# EAGLE board bottom (EAGLE 9.1.1)
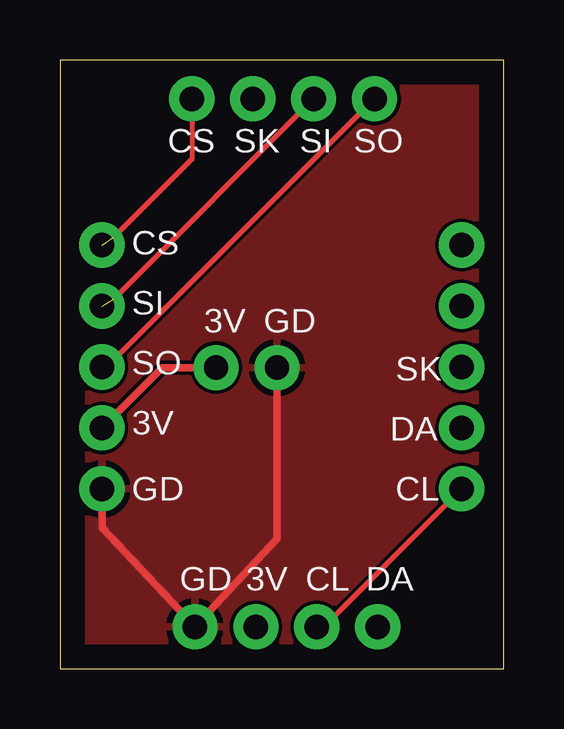
[diagram p0: board, top side]
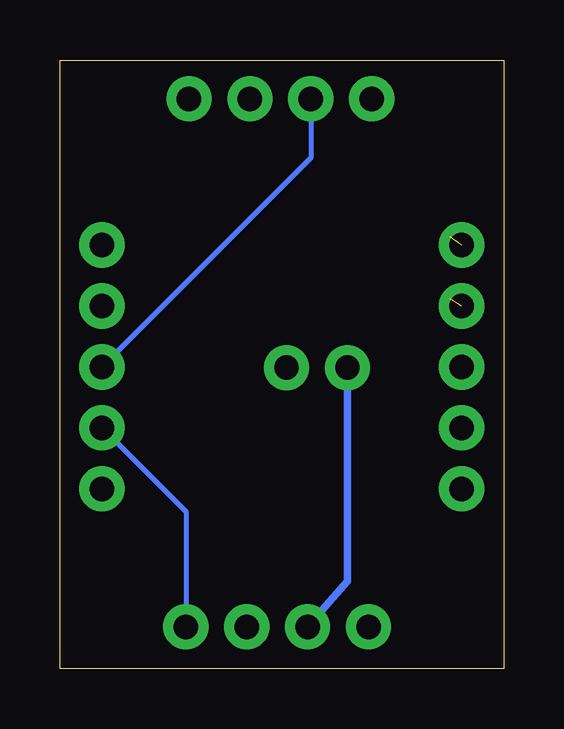
[diagram p1: board, bottom side, seen from below]

Size 18.5 x 25.37 mm. Coordinates in mm from the lower left corner, seen from the top.
Outline: 0,0 18.5,0 18.5,25.37 0,25.37 0,0
Copper layers (1*16): Top 0.035mm / dielectric 1.5mm / Bottom 0.035mm
Design rules "default": minimum track width 6mil, minimum drill 0.35mm, track to track 6mil, track to pad 6mil, pad to pad 6mil, via to via 6mil, smd to smd 6mil, copper to edge 40mil, drill to drill 6mil, minimum pad ring 10mil, minimum via ring 8mil, stop-mask expansion 4mil, vias tented up to drill 0mil, thermal gap 10mil

## Footprints (pad centres in the part's own frame; a part is rotated, then mirrored left to right if it is on the bottom)
1X04_NO_SILK = drill 1.016 pad 1.88: 1 0,0; 2 2.54,0; 3 5.08,0; 4 7.62,0
1X02_NO_SILK = drill 1.016 pad 1.88: 1 0,0; 2 2.54,0
1X05_NO_SILK = drill 1.016 pad 1.88: 1 0,0; 2 2.54,0; 3 5.08,0; 4 7.62,0; 5 10.16,0

## Placement (x,y rotation side)
J3  [1X04_NO_SILK]  13.25,1.75 180 top
J4  [1X02_NO_SILK]  9.05,12.55 180 top
J5  [1X04_NO_SILK]  5.5,23.75 0 top
J6  [1X05_NO_SILK]  1.75,7.5 90 top
J7  [1X05_NO_SILK]  16.75,7.5 90 top

## Library data of the parts
J3 J5 = SparkFun-Connectors; PROD_ID: CONN-09696
J4 J6 J7 = SparkFun-Connectors

## Nets
3V3: J3.3 J4.2 J6.2
CS: J5.1 J6.5
GND: J3.4 J4.1 J6.1
MISO: J5.4 J6.3
MOSI: J5.3 J6.4
N$6: J7.5
N$7: J7.4
SCK: J5.2 J7.3
SCL: J3.2 J7.1
SDA: J3.1 J7.2

## Tracks (layer width: path | path; a pad name or v marks a point on that pad's centre or on a via)
3V3
  Top 0.305: J4.2 4.26,12.55 J6.2
  Bottom 0.305: J4.2 6.51,3.66 J3.3
CS  (1 unrouted)
  Top 0.203: J5.1 5.5,21.25 2.25,18
GND
  Top 0.305: J4.1 9.05,5.42 J3.4 1.75,5.88 J6.1
  pour Top: 0,25.25 18.5,25.25 18.5,0 0,0
MISO
  Top 0.203: J5.4 1.95,12.58 J6.3
MOSI  (1 unrouted)
  Top 0.203: J5.3 2.25,15.42 2.25,14.75
SCK
  Bottom 0.203: J5.2 8.04,21.29 J7.3
SCL
  Top 0.203: J7.1 11.25,2 J3.2
SDA
  Bottom 0.203: J7.2 13.25,6.54 J3.1

## Text on the board
tNames: CS | SK | SI | SO | CS | SI | 3V | GD | SO | SK | 3V | DA | GD | CL | GD | 3V | CL | DA